# EAGLE board timetwister (EAGLE 6.6.0)
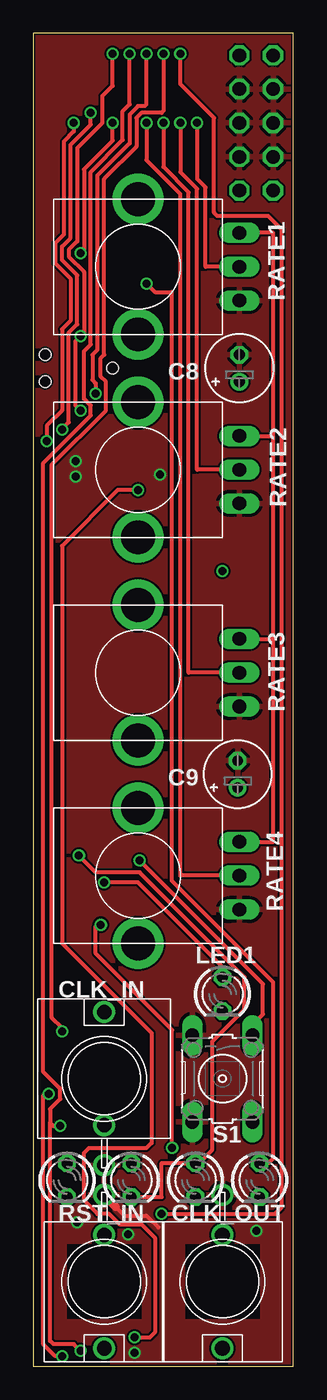
[diagram p0: board, top side]
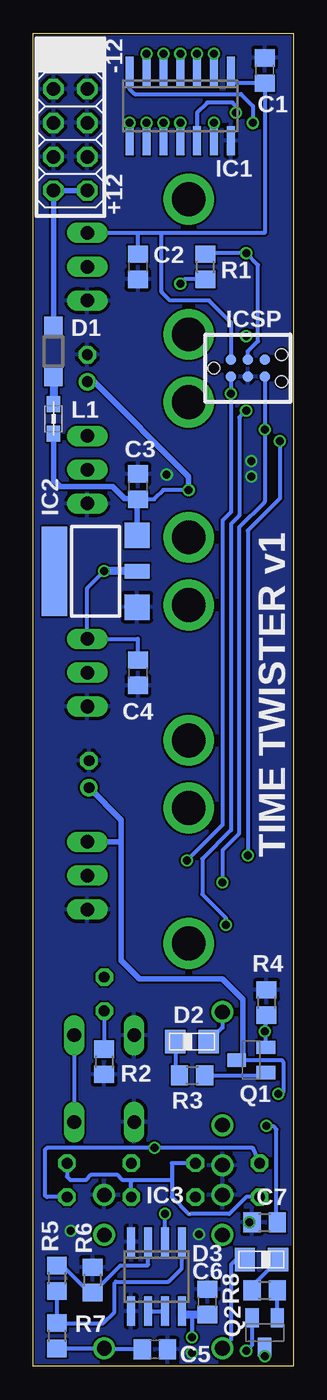
[diagram p1: board, bottom side, seen from below]

Size 19.56 x 100.08 mm. Coordinates in mm from the lower left corner, seen from the top.
Outline: 0,0 19.56,0 19.56,100.08 0,100.08 0,0
Copper layers (1*16): Top 0.035mm / dielectric 1.5mm / Bottom 0.035mm
Design rules "hackvana": minimum track width 6mil, minimum drill 0.3mm, track to track 6mil, track to pad 9mil, pad to pad 6mil, via to via 6mil, smd to smd 0mil, copper to edge 6mil, drill to drill 6mil, minimum pad ring 10mil, minimum via ring 6mil, stop-mask expansion 2mil, vias tented up to drill 100mil, thermal gap 10mil

## Footprints (pad centres in the part's own frame; a part is rotated, then mirrored left to right if it is on the bottom)
C0805 = smd 1.3 x 1.5: 1 -0.95,0; 2 0.95,0
R0805 = smd 1.3 x 1.5: 1 -0.95,0; 2 0.95,0
E2-5 = drill 0.813 pad 1.27: + -1.016,0 | drill 0.813 pad 1.27 octagon: - 1.016,0
WQP-PJ301M-ST = drill 1.1: P$1 0,5; P$2 0,-3.5; P$3 0,-6.5
WQP-PJ301M-12_JACK = drill 1.1: P$1 0,5; P$2 0,-3.5; P$3 0,-6.5
SOD123 = smd 1.4 x 1.4: A 1.9,0; C -1.9,0
0805DIODE = smd 1.524 x 1.778: A -1.262,-0.005; C 1.238,-0.005
SO14 = smd 0.6 x 2.2: 1 -3.81,-2.6; 2 -2.54,-2.6; 3 -1.27,-2.6; 4 0,-2.6; 5 1.27,-2.6; 6 2.54,-2.6; 7 3.81,-2.6; 8 3.81,2.6; 9 2.54,2.6; 10 1.27,2.6; 11 0,2.6; 12 -1.27,2.6; 13 -2.54,2.6; 14 -3.81,2.6
SOT223-W = smd 1.9 x 1.9: 1 -2.7,-3.1; 3 2.7,-3.1 | smd 1.1 x 1.9: 2 0,-3.1 | smd 6.7 x 1.9: 4 0,3.1
SO08 = smd 0.6 x 2.2: 1 -1.905,-2.6; 2 -0.635,-2.6; 3 0.635,-2.6; 4 1.905,-2.6; 5 1.905,2.6; 6 0.635,2.6; 7 -0.635,2.6; 8 -1.905,2.6
TC2030-MCP-NL = smd 0.787 x 0.787: 1 1.27,-0.635; 2 1.27,0.635; 3 2.54,-0.635; 4 2.54,0.635; 5 3.81,-0.635; 6 3.81,0.635 | hole 0.889: 0,0; 5.08,-1.016; 5.08,1.016
0805 = smd 1.2 x 1: 1 -1.1,0; 2 1.1,0
LED3MM = drill 0.813 octagon: A -1.27,0; K 1.27,0
2X05 = drill 1.016 octagon: 1 -5.08,-1.27; 2 -5.08,1.27; 3 -2.54,-1.27; 4 -2.54,1.27; 5 0,-1.27; 6 0,1.27; 7 2.54,-1.27; 8 2.54,1.27; 9 5.08,-1.27; 10 5.08,1.27
SOT23-BEC = smd 1 x 1.4: B -0.95,-1.1; C 0,1.1; E 0.95,-1.1
SMALL_ALPS_POT = drill 1.016 long: A -2.54,-7.62; B 2.54,-7.62; W 0,-7.62 | drill 2.54 pad 3.81: GND@1 -5.08,0; GND@2 5.08,0
B3F-10XX = drill 1.016 long: 1 -3.251,2.261; 2 3.251,2.261; 3 -3.251,-2.261; 4 3.251,-2.261

## Placement (x,y rotation side)
C1  [C0805]  2.16,97.28 90 bottom
C2  [C0805]  11.68,82.55 270 bottom
C3  [C0805]  11.68,66.04 90 bottom
C4  [C0805]  11.68,52.07 270 bottom
C5  [C0805]  10.41,1.27 0 bottom
C6  [C0805]  6.48,4.83 90 bottom
C7  [R0805]  2.16,10.79 0 bottom
C8  [E2-5]  15.49,74.93 90 top
C9  [E2-5]  15.37,44.45 90 top
CLK_IN  THONKICONN_STEREO  [WQP-PJ301M-ST]  5.33,21.59 0 top
CLK_OUT  WQP-PJ301M-12_JACK  [WQP-PJ301M-12_JACK]  14.22,6.35 180 top
D1  MBR0520LT  [SOD123]  18.03,76.2 90 bottom
D2  0805DIODE  [0805DIODE]  7.62,24.38 0 bottom
D3  0805DIODE  [0805DIODE]  2.41,8 180 bottom
IC1  PIC16F1825SO14  [SO14]  8.51,94.61 180 bottom
IC2  [SOT223-W]  14.86,59.69 90 bottom
IC3  LM358D  [SO08]  10.29,6.73 180 bottom
ICSP  [TC2030-MCP-NL]  5.97,74.93 0 bottom
L1  [0805]  18.03,71.12 270 bottom
LED1  [LED3MM]  14.22,27.94 270 top
LED2  [LED3MM]  2.54,13.97 270 top
LED3  [LED3MM]  7.37,13.97 270 top
LED4  [LED3MM]  12.19,13.97 270 top
LED5  [LED3MM]  17.02,13.97 270 top
POWER  [2X05]  16.76,93.34 90 bottom
Q1  [SOT23-BEC]  3.17,22.99 90 bottom
Q2  [SOT23-BEC]  2.16,2.54 180 bottom
R1  [R0805]  6.6,82.55 90 bottom
R2  [R0805]  14.22,22.86 270 bottom
R3  [R0805]  7.62,21.84 0 bottom
R4  [R0805]  2.03,27.3 270 bottom
R5  [R0805]  17.78,6.6 270 bottom
R6  [R0805]  15.11,6.48 270 bottom
R7  [R0805]  17.78,2.29 270 bottom
R8  [R0805]  2.16,5.71 0 bottom
RATE1  ALPS_POT_SMALL  [SMALL_ALPS_POT]  7.87,82.55 90 top
RATE2  ALPS_POT_SMALL  [SMALL_ALPS_POT]  7.87,67.31 90 top
RATE3  ALPS_POT_SMALL  [SMALL_ALPS_POT]  7.87,52.07 90 top
RATE4  ALPS_POT_SMALL  [SMALL_ALPS_POT]  7.87,36.83 90 top
RST_IN  WQP-PJ301M-12_JACK  [WQP-PJ301M-12_JACK]  5.33,6.35 180 top
S1  [B3F-10XX]  14.22,21.59 270 top

## Library data of the parts
C1-C9 R1-R8 = rcl
CLK_IN = jason_eagle6
CLK_OUT RST_IN = thonkiconn
D1 = diode
D2 D3 IC1 RATE1-RATE4 = jasons_stuff
IC2 = microbuilder
IC3 = linear
ICSP = tag-connect
L1 = wuerth-elektronik
LED1-LED5 = led
POWER = pinhead
Q1 Q2 = transistor-neu-to92
S1 = switch-omron; MPN: B3F-1000; OC_FARNELL: 176432; OC_NEWARK: 36M3542

## Nets
+12V: C3.1 C6.1 C8.+ IC2.3 IC3.8 L1.2
CLOCK_IN: IC1.5 Q1.E R4.2
CLOCK_OUT: IC1.6 IC3.2
GND: C1.2 C2.2 C3.2 C4.2 C5.2 C6.2 C7.1 C8.- C9.- CLK_IN.P$3 CLK_OUT.P$3 IC1.14 IC2.1 IC3.4 IC3.5 ICSP.3 POWER.3 POWER.4 POWER.5 POWER.6 POWER.7 POWER.8 R2.2 R4.1 R6.1 RATE1.A RATE2.A RATE3.A RATE4.A RST_IN.P$3 S1.3 S1.4
LED0: IC1.12 ICSP.5 LED1.A
LED1: IC1.2 LED2.A LED5.K
LED2: IC1.7 LED3.K LED4.A
LED_COM: IC1.13 ICSP.4 R1.2
N$1: CLK_IN.P$1 D2.C
N$2: D2.A R3.1
N$3: Q1.B R3.2
N$4: D3.A R8.1
N$5: Q2.B R8.2
N$6: IC3.3 R5.1 R6.2
N$7: D3.C RST_IN.P$1
N$8: IC3.6 IC3.7
N$9: LED1.K R2.1
N$10: IC3.1 R5.2 R7.1
N$11: C5.1 CLK_OUT.P$1 R7.2
N$13: D1.A POWER.1 POWER.2
N$14: LED2.K LED3.A LED4.K LED5.A R1.1
N$15: D1.C L1.1
N$19: IC1.4 ICSP.1 S1.1 S1.2
POT1: IC1.8 RATE1.W
POT2: IC1.9 RATE2.W
POT3: IC1.10 RATE3.W
POT4: IC1.11 RATE4.W
RESET_IN: C7.2 IC1.3 Q2.E
VCC: C1.1 C2.1 C4.1 C9.+ IC1.1 IC2.2 ICSP.2 Q1.C Q2.C RATE1.B RATE2.B RATE3.B RATE4.B

## Tracks (layer width: path | path; a pad name or v marks a point on that pad's centre or on a via)
+12V  (via drill 0.6)
  Top 0.305: v7.87,65.79 6.35,65.79 2.16,61.59 2.16,31.75 8.89,25.02 8.89,16.76 8.51,16.38 4.19,16.38 3.81,16 3.81,12.45 4.83,11.43 5.72,11.43 6.48,10.67 8.13,10.67 9.14,9.65 9.14,2.54 8.76,2.16 v7.62,2.16
  Bottom 0.305: 7.62,3.94 v7.62,2.16 | v7.87,65.79 9.78,65.79 10.48,65.09 C3.1
  Bottom 0.406: IC3.8 8.38,3.94 7.62,3.94 | L1.2 18.03,66.55 17.53,66.04 13.59,66.04 12.7,65.15 11.75,65.15 C3.1 | 11.76,65.02 IC2.3 | C8.+ 14.99,73.91 7.87,66.8 v7.87,65.79
  Bottom 0.61: 11.92,62.23 IC2.3 | 11.76,65.02 C3.1 | C6.1 8.38,3.88 IC3.8
CLOCK_IN  (via drill 0.6)
  Top 0.305: v2.16,25.15 2.16,25.4 1.4,26.16 1.4,67.69 5.46,71.75 5.46,73.91 5.08,74.3 5.08,75.69 5.33,75.95 5.33,89.15 7.75,91.57 7.75,93.73 8.13,94.11 9.65,94.11 9.78,94.23 v9.78,98.55
  Bottom 0.305: R4.2 2.08,26.31 Q1.E 2.08,25.06 v2.16,25.15 | IC1.5 v9.78,98.55
CLOCK_OUT  (via drill 0.6)
  Top 0.305: v9.65,11.43 18.16,11.43 18.67,11.94 18.67,85.34 17.65,86.36 13.84,86.36 13.59,86.61 13.59,93.73 11.05,96.27 v11.05,98.55
  Bottom 0.305: IC3.2 v9.65,11.43 | v11.05,98.55 IC1.6
GND  (via drill 0.6)
  Top 0.305: 6.22,11.94 6.86,11.3 8.51,11.3 9.4,10.41
  Top 0.61: RST_IN.P$3 5.33,12.83 6.22,11.94
  other vias: 16.76,10.16 7.11,9.91 3.3,10.79 7.62,1.02 3.17,67.94 3.17,66.8 9.52,66.93
  pour Bottom: -4.83,104.14 -4.83,-5.08 23.11,-5.08 23.11,106.68 -4.83,106.68
  pour Top: -2.29,101.6 -2.29,-5.08 20.57,-5.08 20.57,101.6
LED0  (via drill 0.6)
  Top 0.305: LED1.A 14.22,29.97 7.87,36.32 v5.33,36.32 | v2.16,70.31 2.16,70.36 2.67,70.87 2.67,77.6 3.3,78.23 3.3,81.92 2.16,83.06 2.16,84.07 2.79,84.71 2.79,91.69 4.32,93.22 v4.32,94.11
  Bottom 0.305: ICSP.5 v2.16,70.31 2.16,64.9 4.06,62.99 4.06,40.01 5.33,38.73 v5.33,36.32 | IC1.12 7.24,94.11 6.48,94.87 4.57,94.87 4.32,94.61 v4.32,94.11
LED1  (via drill 0.6)
  Top 0.305: v10.45,16.38 10.45,25.24 4.7,30.99 4.7,33.02 4.83,33.15 v5.08,33.15 | v3.56,71.75 3.17,72.14 3.17,76.96 v3.56,77.34 3.81,77.6 3.81,82.17 2.67,83.31 2.67,83.82 3.3,84.45 3.3,91.44 5.21,93.34 5.21,95.38 5.97,96.14 v5.97,98.55
  Bottom 0.305: LED2.A 3.05,16.38 v10.45,16.38 18.54,16.38 18.67,16.26 18.67,12.83 18.54,12.7 LED5.K | 3.43,77.22 v3.56,77.34 | v3.56,71.75 4.06,71.25 4.06,63.88 4.7,63.25 4.7,40.26 6.86,38.1 6.86,35.43 5.08,33.66 v5.08,33.15 | IC1.2 v5.97,98.55
LED2  (via drill 0.6)
  Top 0.305: LED3.K 9.65,12.7 9.65,15.24 LED4.A | 11.18,15.24 LED4.A | v1.02,69.47 1.02,70.61 2.16,71.75 2.16,77.85 2.79,78.49 2.79,81.66 1.65,82.8 1.65,84.33 2.29,84.96 2.29,91.95 3.05,92.71 v3.05,93.34 | LED4.A 12.45,15.24 13.46,16.26 13.46,24.38 15.88,26.8 15.88,29.21 8,37.08 4.7,37.08 v3.43,38.35
  Bottom 0.305: IC1.7 12.32,95.89 11.94,95.5 3.94,95.5 3.05,94.61 v3.05,93.34 | v3.43,38.35 3.43,62.74 1.02,65.15 v1.02,69.47
LED_COM  (via drill 0.6)
  Top 0.305: v3.56,83.57 3.81,83.82 3.81,89.86 IC1.13 v5.97,93.34
  Bottom 0.305: R1.2 6.54,83.57 v3.56,83.57 2.67,82.68 2.67,76.96 3.43,76.2 ICSP.4 | v5.97,93.34 IC1.13
N$1
  Bottom 0.305: CLK_IN.P$1 5.33,25.43 D2.C
N$2
  Bottom 0.305: D2.A 8.88,22.16 R3.1
N$3
  Bottom 0.305: R3.2 1.76,21.84 Q1.B
N$4
  Bottom 0.305: D3.A 0.9,8.25 2.79,6.35 2.79,6.03 R8.1
N$5
  Bottom 0.305: Q2.B R8.2
N$6
  Bottom 0.305: IC3.3 10.92,7.62 10.99,7.55 13.02,7.55 14.61,5.97 14.67,5.97 R6.2 15.31,5.53 17.33,7.55 R5.1
N$7
  Bottom 0.305: D3.C 4.06,8.26 4.7,7.62 4.7,1.99 RST_IN.P$1
N$8
  Bottom 0.305: IC3.6 IC3.7
N$9
  Bottom 0.305: LED1.K R2.1
N$10
  Bottom 0.305: R5.2 R7.1 14.29,3.24 13.46,4.06 13.46,6.22 13.33,6.35 9.4,6.35 8.38,7.37 IC3.1
N$11
  Bottom 0.305: C5.1 14.22,1.27 CLK_OUT.P$1 14.24,1.34 R7.2
N$13
  Bottom 0.406: D1.A POWER.2 POWER.1
N$14  (via drill 0.6)  (1 unrouted)
  Top 0.305: LED5.A 17.65,15.24 18.03,15.62 18.03,28.83 10.41,36.45 10.41,80.64 9.14,80.64 v8.51,81.28
  Bottom 0.305: 9.14,13.97 12.32,13.97 | LED4.K 12.19,13.84 12.32,13.97 | LED2.K 3.56,12.7 4.83,11.43 7.75,11.43 | LED3.A 9.14,15.24 9.14,13.97 | 9.14,13.97 9.14,12.7 7.87,11.43 | LED5.A 17.02,14.22 16.76,13.97 15.62,13.97 15.24,14.35 13.21,14.35 12.83,13.97 12.32,13.97 | R1.1 8.19,81.6 v8.51,81.28
N$15
  Bottom 0.61: D1.C L1.1
N$19  (via drill 0.6)
  Top 0.305: S1.1 16.48,25.63 17.27,26.42 17.27,28.7 v8,37.97 | v4.7,73.03 4.7,73.79 4.44,74.04 4.44,75.95 4.83,76.33 4.83,89.41 7.24,91.82 7.24,93.98 7.87,94.61 8.38,94.61 8.51,94.74 v8.51,98.55
  Bottom 0.305: ICSP.1 v4.7,73.03 4.7,64.14 5.33,63.5 5.33,40.64 v8,37.97 | v8.51,98.55 IC1.4 | S1.1 S1.2
POT1  (via drill 0.6)
  Top 0.305: RATE1.W 12.95,82.55 12.95,88.52 12.32,89.15 v12.32,93.34
  Bottom 0.305: IC1.8 v12.32,93.34
POT2  (via drill 0.6)
  Top 0.305: RATE2.W 12.32,67.31 12.32,88.39 11.05,89.66 v11.05,93.34
  Bottom 0.305: IC1.9 v11.05,93.34
POT3  (via drill 0.6)
  Top 0.305: RATE3.W 11.68,52.07 11.68,88.14 9.78,90.04 v9.78,93.34
  Bottom 0.305: IC1.10 v9.78,93.34
POT4  (via drill 0.6)
  Top 0.305: RATE4.W 11.05,36.83 11.05,88.01 8.51,90.55 v8.51,93.34
  Bottom 0.305: IC1.11 v8.51,93.34
RESET_IN  (via drill 0.6)
  Top 0.305: v3.56,1.14 3.05,1.65 1.52,1.65 1.27,1.91 1.27,18.29 | 1.27,18.29 1.27,19.3 2.03,20.07 2.03,20.83 0.76,22.1 0.76,67.82 4.32,71.37 4.32,72.14 3.81,72.64 3.81,76.2 4.32,76.71 4.32,89.66 6.73,92.08 6.73,94.23 7.24,94.74 v7.24,98.55 | 1.27,18.29 1.52,18.03 v2.03,18.03
  Bottom 0.305: Q2.E 3.11,1.59 v3.56,1.14 | 1.14,10.86 C7.2 1.27,10.86 1.27,17.78 1.52,18.03 v2.03,18.03 | IC1.3 v7.24,98.55
VCC  (via drill 0.6)
  Top 0.305: RATE4.B 18.03,39.37 18.03,54.61 | 18.03,54.61 18.03,69.85 | 18.03,69.85 18.03,85.09 RATE1.B | RATE2.B 18.03,69.85 | RATE3.B 18.03,54.61 | v2.16,0.76 1.65,0.76 0.76,1.65 0.76,20.32 0.89,20.45 v1.14,20.45
  Bottom 0.305: Q2.C v2.16,0.76 | C4.1 11.68,54.61 RATE3.B 15.49,58.42 v14.22,59.69 | Q1.C 0.89,22.99 0.76,22.86 0.76,20.57 0.89,20.45 v1.14,20.45 | RATE1.B 11.68,85.09 | C2.1 11.68,85.09 | 11.68,85.09 9.91,85.09 | 9.91,85.09 2.16,85.09 C1.1 4.51,96.33 4.7,96.52 IC1.1 | ICSP.2 4.7,78.36 6.35,80.01 9.27,80.01 9.91,80.64 9.91,85.09
  Bottom 0.406: Q1.C 3.81,23.45 3.81,27.56 5.33,29.08 11.56,29.08 12.95,30.48 12.95,39.37 | 12.95,39.37 12.95,41.02 C9.+ | RATE4.B 12.95,39.37
  Bottom 0.61: IC2.2 v14.22,59.69

## Text on the board
bPlace: -12 | +12 | TIME TWISTER v1